# Altium PCB PCB1.PcbDoc
Units mm, origin at the board's own origin, x right, y up, seen from the top; angles counter-clockwise.
Board outline 65 x 53 mm, 2 copper layers (Top Layer, Bottom Layer); 19 components, 32 nets, 102 pads, 11 vias.
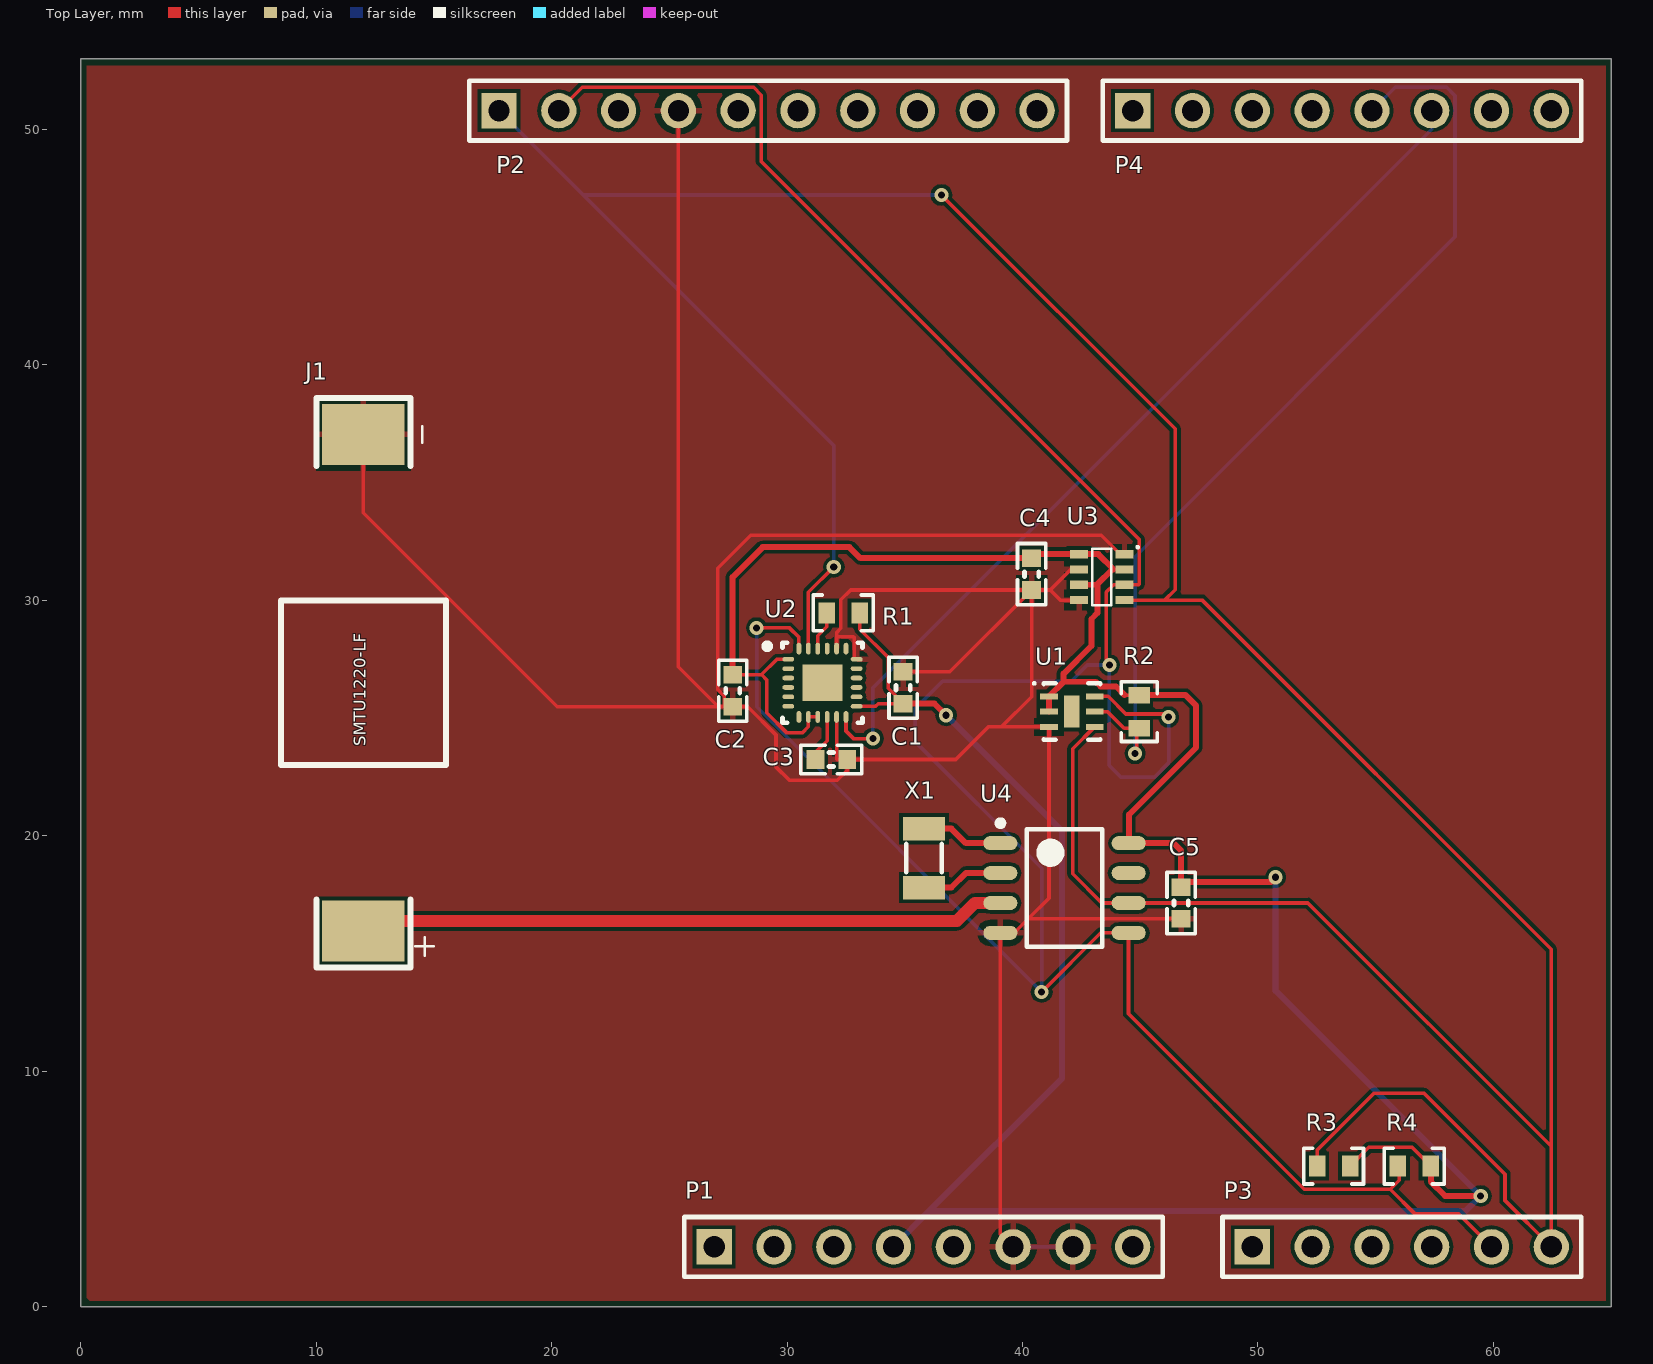
[diagram p0: Top Layer view]
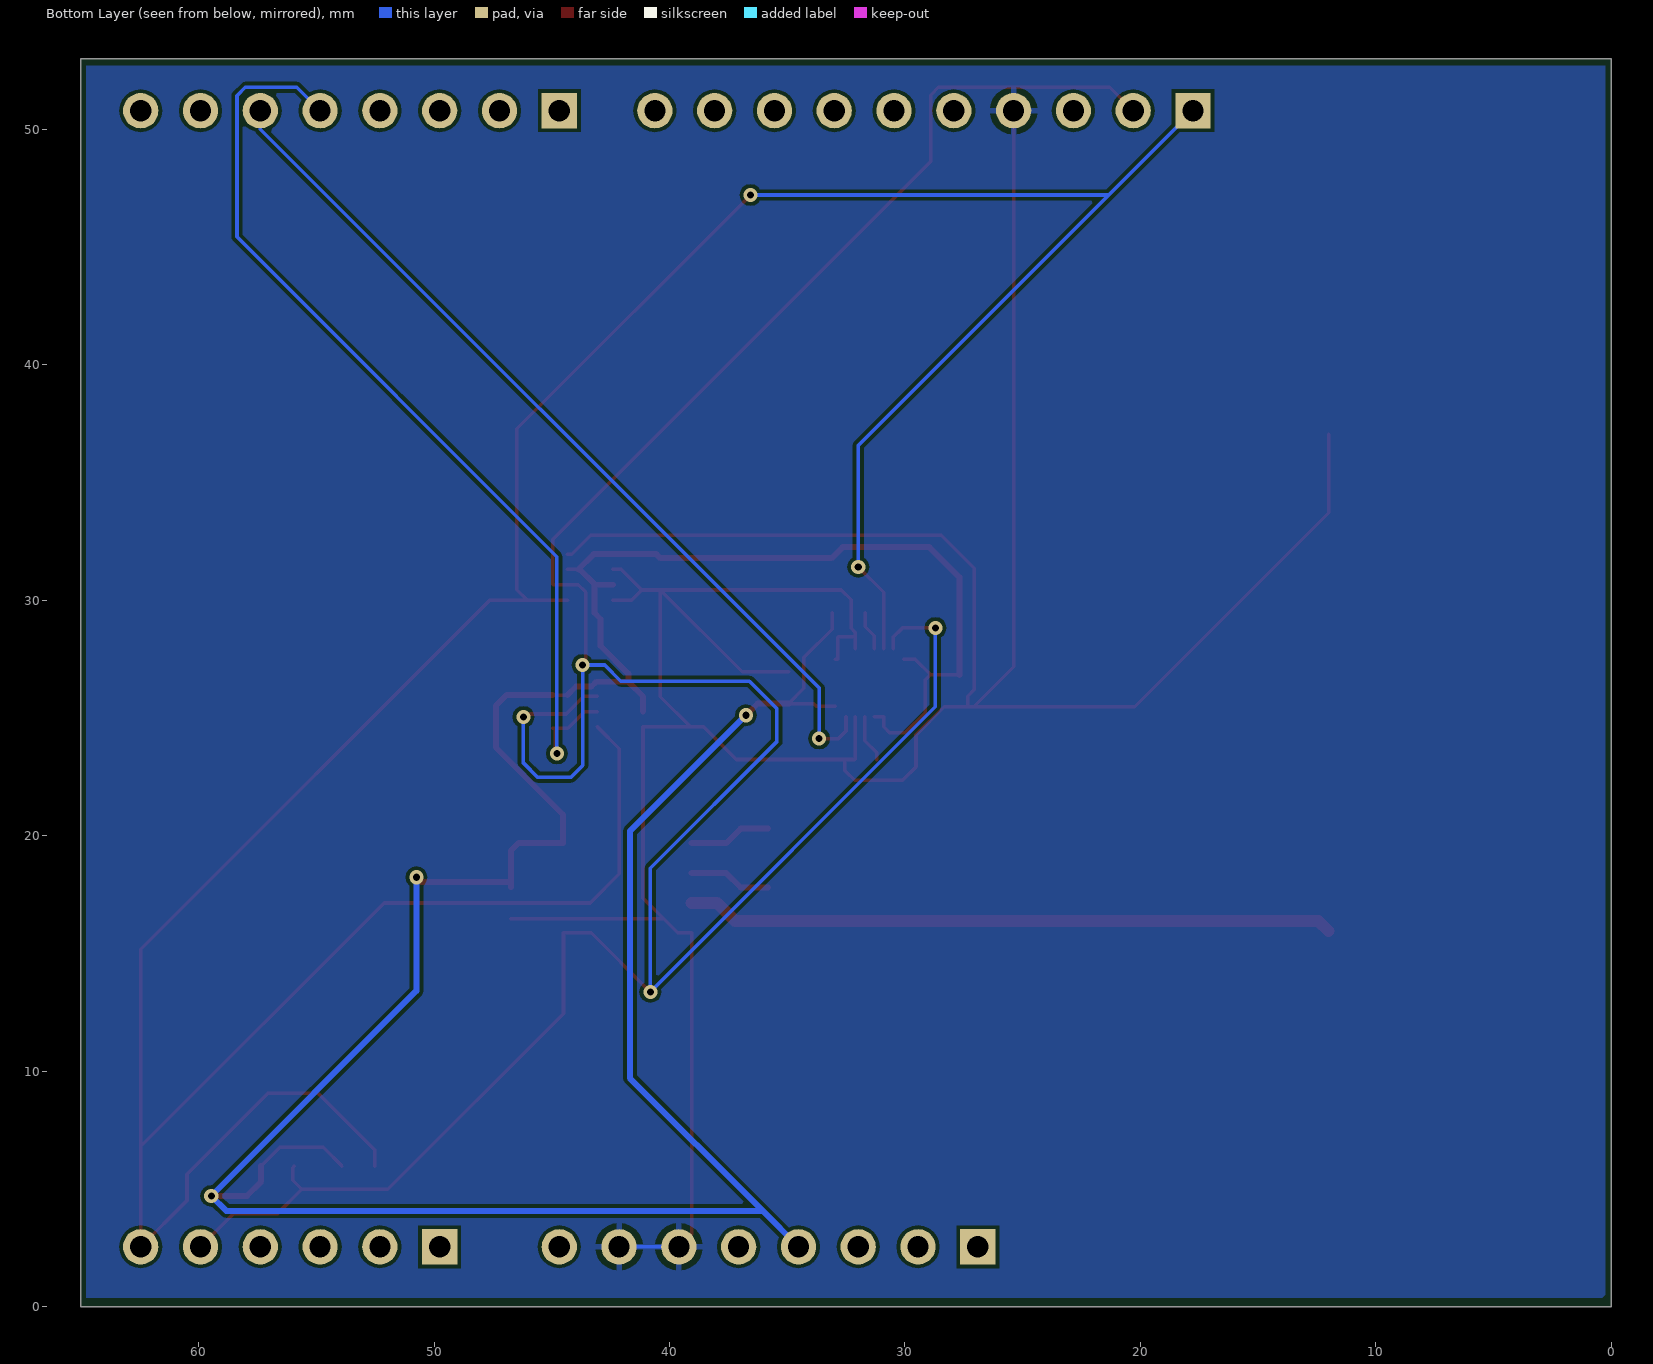
[diagram p1: Bottom Layer view, seen from below]

## Layer stack, top to bottom
Top Solder: solder mask 0.0102, Solder Resist, Dk 3.5
Top Layer: signal copper 0.0356
Dielectric 1: dielectric 0.32, FR-4, Dk 4.8
Bottom Layer: signal copper 0.0356
Bottom Solder: solder mask 0.0102, Solder Resist, Dk 3.5

## Board outline
0,0 0,53 65,53 65,0

## Design rules (kind name [scope] priority, off if disabled: settings)
Clearance [All] p1: gap=0.152
HoleToHoleClearance [All] p1: gap=0.152 allowstackedmicrovias=TRUE
LayerPairs [All] p1 off: enforce=TRUE
MinimumSolderMaskSliver [All] p1 off: minsoldermaskwidth=0.152
NetAntennae [All] p1 off: netantennaetolerance=0
PolygonConnect [All] p1: connectstyle=Relief reliefconductorwidth=0.254 reliefentries=4 polygonreliefangle="90 Angle" airgapwidth=0.254
RoutingVias [All] p1: holewidth=0.711 width=1.27 viastyle="Through Hole" minholewidth=0.711 minwidth=1.27 maxholewidth=0.711 maxwidth=1.27
SilkToBoardRegionClearance [All] p1 off:
SilkToSilkClearance [All] p1 off: silktosilkclearance=0.152
SilkToSolderMaskClearance [IsPad] p1 off: minsilkscreentomaskgap=0.152 clearancetoexposedcopper=TRUE
SolderMaskExpansion [All] p1: expansion=0.102
UnpouredPolygon [All] p1: allowunpoured=FALSE
Width [All] p1: maxlimit=20 minlimit=0.152 preferedwidth=0.254
22 further rules are at their usual default settings.

## Components (designator, comment, footprint, x,y, rotation, side; value= is the part's Value field where it differs from the comment)
C1 "0.1uF" CAPC1608X06L 34.925,26.289 r270 top
C2 "10nF" CAPC1608X06L 27.686,26.162 r90 top
C3 "0.1uF" CAPC1608X06L 31.877,23.241 r180 top
C4 "0.1uF" CAPC1608X06L 40.386,31.115 r90 top
C5 "0.1uF" CAPC1608X06L 46.736,17.145 r90 top
J1 "COIN_CELL" SMTU1220-LF 12,26.5 r90 top
P1 "Header 8" HDR1X8 26.9,2.54 r0 top locked
P2 "Header 10" HDR1X10 17.76,50.8 r0 top locked
P3 "Header 6" HDR1X6 49.76,2.54 r0 top locked
P4 "Header 8" HDR1X8 44.68,50.8 r0 top locked
R1 "4.7k" RESC1608X06N 32.385,29.464 r0 top
R2 "4.7k" RESC1608X06N 44.958,25.273 r90 top
R3 "4.7k" RESC1608X06N 53.213,5.969 r0 top
R4 "4.7k" RESC1608X06N 56.642,5.969 r0 top
U1 "OPT3001" SON65P200X65_HS-7N 42.095,25.273 r0 top
U2 "MPU9250" QFN40P300X300X105_HS-25N 31.5,26.5 r0 top locked
U3 "BMP280" SON65P200X100-8N 43.365,30.988 r0 top
U4 "PCF8523T" SOIC127P600X175-8N 41.783,17.78 r0 top
X1 "32.768KHz" XTAL_3215 35.814,19.05 r90 top

## Footprints (in the part's own frame and the unit in brackets; to place one, negate y for a bottom-side part, rotate by r counter-clockwise, add the part's x,y. Pads: shape width x height; smd on the part's side, far side on the other; paste and mask are expansions set on the pad)
CAPC1608X06L [mm]
  rect 0.75x0.8 smd: 1(-0.675,0) 2(0.675,0)
  silkscreen extent -1.3,-0.6 1.3,0.6, body extent -0.8,-0.43 0.8,0.43, height 0.8
HDR1X6 [mm] "Connector; Header; 6 Position"
  rect 1.5x1.5 hole 0.9: 1(0,0)
  round 1.5 hole 0.9: 2(2.54,0) 3(5.08,0) 4(7.62,0) 5(10.16,0) 6(12.7,0)
  silkscreen extent -1.27,-1.27 13.97,1.27
HDR1X8 [mm] "Connector; Header; 8 Position"
  rect 1.5x1.5 hole 0.9: 1(0,0)
  round 1.5 hole 0.9: 2(2.54,0) 3(5.08,0) 4(7.62,0) 5(10.16,0) 6(12.7,0) 7(15.24,0) 8(17.78,0)
  silkscreen extent -1.27,-1.27 19.05,1.27
HDR1X10 [mm] "Connector; Header; 10 Position"
  rect 1.5x1.5 hole 0.9: 1(0,0)
  round 1.5 hole 0.9: 2(2.54,0) 3(5.08,0) 4(7.62,0) 5(10.16,0) 6(12.7,0) 7(15.24,0) 8(17.78,0) 9(20.32,0) 10(22.86,0)
  silkscreen extent -1.27,-1.27 24.13,1.27
QFN40P300X300X105_HS-25N [mm] "QFN, 24-Leads, Body 3.00x3.00mm, Pitch 0.40mm, Thermal Pad 1.70x1.54mm, IPC Medium Density"
  oval 0.5x0.2 smd: 1(-1.45,1) 2(-1.45,0.6) 3(-1.45,0.2) 4(-1.45,-0.2) 5(-1.45,-0.6) 6(-1.45,-1) 13(1.45,-1) 14(1.45,-0.6) 15(1.45,-0.2) 16(1.45,0.2) 17(1.45,0.6) 18(1.45,1)
  oval 0.2x0.5 smd: 7(-1,-1.45) 8(-0.6,-1.45) 9(-0.2,-1.45) 10(0.2,-1.45) 11(0.6,-1.45) 12(1,-1.45) 19(1,1.45) 20(0.6,1.45) 21(0.2,1.45) 22(-0.2,1.45) 23(-0.6,1.45) 24(-1,1.45)
  rect 1.7x1.54 smd: 25(0,0)
  silkscreen extent -2.47,-1.7 1.7,1.7, body extent -1.55,-1.55 1.55,1.55, height 1.05
RESC1608X06N [mm] "Chip Resistor, 2-Leads, Body 1.60x0.80mm, IPC Medium Density"
  rect 0.7x0.9 smd: 1(-0.7,0) 2(0.7,0)
  silkscreen extent -1.27,-0.76 1.27,0.76, body extent -0.85,-0.45 0.85,0.45, height 0.55
SMTU1220-LF [mm]
  rect 2.6x3.5 smd: 1(-10.55,0) 2(10.55,0)
  silkscreen extent -12.1,-3.5 12.1,3.5
SOIC127P600X175-8N [mm] "SOIC, 8-Leads, Body 4.90x3.90mm, Pitch 1.27mm, IPC Medium Density"
  oval 1.45x0.6 smd: 1(-2.725,1.905) 2(-2.725,0.635) 3(-2.725,-0.635) 4(-2.725,-1.905) 5(2.725,-1.905) 6(2.725,-0.635) 7(2.725,0.635) 8(2.725,1.905)
  silkscreen extent -2.85,-2.5 1.6,2.88, body extent -2,-2.5 2,2.5, height 1.75
SON65P200X65_HS-7N [mm] "SON, 6-Leads, Body 2.00x2.00mm, Pitch 0.65mm, Thermal Pad 1.35x0.65mm, IPC Medium Density"
  rect 0.75x0.25 smd mask+0: 1(-0.97,0.65) 2(-0.97,0) 3(-0.97,-0.65) 4(0.97,-0.65) 5(0.97,0) 6(0.97,0.65)
  rect 0.65x1.35 smd: 7(0,0)
  silkscreen extent -1.65,-1.2 1.2,1.25, body extent -1.05,-1.05 1.05,1.05, height 0.65
SON65P200X100-8N [mm] "SON, 8-Leads, Body 2.50x2.00mm, Pitch 0.65mm, IPC Medium Density"
  rect 0.75x0.35 smd mask+0: 1(0.965,0.975) 2(0.965,0.325) 3(0.965,-0.325) 4(0.965,-0.975) 5(-0.965,-0.975) 6(-0.965,-0.325) 7(-0.965,0.325) 8(-0.965,0.975)
  silkscreen extent -0.4,-1.2 1.57,1.32, body extent -1.05,-1.3 1.05,1.3, height 1
XTAL_3215 [mm]
  rect 1x1.8 smd: 1(-1.25,0) 2(1.25,0)
  silkscreen extent -0.6,-0.75 0.6,0.75, body extent -1.6,-0.75 1.6,0.75, height 0.81

## Part data
P1 P4: "Header, 8-Pin"
P2: "Header, 10-Pin"
P3: "Header, 6-Pin"
X1: "32.768KHZ ±20PPM,9.0PF - CRYSTAL, SM, WATCH"

## Via types
v1: diameter 0.6, hole 0.3, Top Layer to Bottom Layer, 11 vias

## Nets (pads, with @x,y where several pads share a name; then routed paths per layer and width w, separated by ;. In a path a pad name is that pad's centre, name@x,y a point inside that pad or via, vN(x,y) a via of type N, cw(c..) or ccw(c..) an arc to the next point about the centre after c; other vN are vias at no path point)
3V3: C1.2 C2.2 C4.2 C5.2 P1.4 R1.2 R2.2 R3.2 R4.2 U1.1 U1.2 U2.1 U2.8 U2.9 U2.13 U3.2 U3.6 U3.8 U4.8 | length 142.7
  Top Layer w0.152: C2.2 28.916,26.837 29.134,26.619 29.134,25.222 29.972,24.384 30.658,24.384 30.9,24.626 U2.8 U2.9 ; 28.903,26.837 29.566,27.5 U2.1 ; U2.13 33.755,25.5 33.869,25.614 C1.2 34.925,25.629 34.29,26.264 34.29,27.573 33.085,28.778 R1.2 ; U3.8 U3.8@42.418,31.963 ; 43.815,31.313 43.871,31.313 U3.2 ; 44.334,25.973 R2.2 ; U4.8 U4.8@44.526,19.685 ; C5.2 C5.2@46.749,18.034 ; R3.2 54.712,6.768 56.543,6.768 R4.2
  Top Layer w0.254: C2.2 27.686,30.988 28.956,32.258 32.639,32.258 33.107,31.79 C4.2 40.559,31.963 U3.8 ; C1.2 36.26,25.614 v1(36.754,25.121) ; U1.2 U1.1 41.745,26.543 ; U3.6 43.165,30.663 43.18,30.678 ; U3.8@42.418,31.963 43.221,31.963 43.871,31.313 ; 43.815,31.313 43.18,30.678 ; 44.334,25.973 43.967,26.34 43.309,26.34 43.107,26.543 41.745,26.543 ; R2.2 46.925,25.973 47.371,25.527 47.371,23.749 44.526,20.904 44.526,19.685 46.419,19.685 46.736,19.367 C5.2 ; C5.2@46.749,18.034 50.546,18.034 v1(50.749,18.237) ; R4.2 57.342,5.309 57.952,4.699 v1(59.461,4.699) ; 41.745,26.543 41.745,26.886 42.926,28.067 42.926,29.21 43.18,29.464 43.18,30.678
  Bottom Layer w0.254: P1.4 36.044,4.064 ; v1(36.754,25.121) 41.681,20.193 41.681,9.701 36.044,4.064 ; v1(50.749,18.237) 50.749,13.411 v1(59.461,4.699) 58.826,4.064 36.044,4.064
5V: P1.5
AREF: P2.3
GND: C1.1 C2.1 C3.1 C4.1 C5.1 J1.2 P1.6 P1.7 P2.4 U1.3 U2.11 U2.18 U2.20 U3.1 U3.5 U3.7 U4.4 | length 153.4
  Top Layer w0.152: J1.2 12,33.72 20.233,25.487 27.076,25.487 ; P2.4 25.38,27.183 27.076,25.487 ; U2.11 32.1,23.266 32.125,23.241 C3.1 ; U2.20 32.1,28.423 ; U2.18 32.842,27.5 32.842,28.423 32.817,28.448 32.125,28.448 32.1,28.423 ; C1.1 36.91,26.964 C4.1 ; P1.6 39.058,3.082 U4.4 39.649,15.875 40.244,16.47 ; U1.3 U1.3@41.123,24.623 ; U3.5 41.6,30.013 41.173,30.44 ; U3.7 42.046,31.313 41.173,30.44 ; U3.1 44.145,31.963 43.342,32.766 28.448,32.766 27.051,31.369 27.051,26.213 27.33,25.933 C2.1@27.33,25.487 ; C5.1 40.244,16.47 ; 27.076,25.487 C2.1@27.33,25.487 ; C2.1@27.33,25.487 28.323,25.487 29.527,24.282 29.527,22.924 30.099,22.352 32.131,22.352 32.552,22.773 C3.1 ; 32.1,28.423 32.1,28.626 32.283,28.809 32.283,30.021 32.703,30.44 C4.1 ; C3.1 37.16,23.241 38.542,24.623 39.101,24.623 ; 39.101,24.623 U1.3@41.123,24.623 ; 39.101,24.623 40.386,25.908 C4.1 ; 40.244,16.47 41.123,17.348 U1.3@41.123,24.623 ; C4.1 41.173,30.44
  Bottom Layer w0.152: P1.6 P1.7
INT0: P4.6 U2.12 | length 38.4
  Top Layer w0.152: U2.12 32.5,24.447 32.818,24.129 v1(33.642,24.129)
  Bottom Layer w0.152: v1(33.642,24.129) 33.642,26.276 57.38,50.014 P4.6
INT1: P4.5 R2.1 U1.5 | length 40.9
  Top Layer w0.152: U1.5 43.612,25.273 44.312,24.573 R2.1@44.856,24.573 ; v1(44.78,23.495) 44.856,23.571 R2.1@44.856,24.573 ; R2.1 R2.1@44.856,24.573
  Bottom Layer w0.152: v1(44.78,23.495) 44.78,31.852 58.369,45.441 58.369,51.435 58.014,51.791 55.831,51.791 P4.5
IOREF: P1.2
NetC3_2: C3.2 U2.10 | length 2
  Top Layer w0.152: C3.2 31.202,23.545 31.7,24.043 U2.10
NetJ1_1: J1.1 U4.3 | length 27.6
  Top Layer w0.512: J1.1 12.433,16.383 37.211,16.383 37.973,17.145 U4.3
NetR1_1: R1.1 U2.22 | length 1.7
  Top Layer w0.152: U2.22 31.3,28.499 31.685,28.884 R1.1
NetU4_1: U4.1 X1.2 | length 3.5
  Top Layer w0.254: X1.2 36.977,20.3 37.592,19.685 U4.1
NetU4_2: U4.2 X1.1 | length 3.5
  Top Layer w0.254: X1.1 36.977,17.8 37.592,18.415 U4.2
PB0: P2.10
PB1: P2.9
PB2/SS: P2.8
PB3/MOSI: P2.7
PB4/MISO: P2.6
PB6/SCK: P2.5
PC0/A0: P3.1
PC1/A1: P3.2
PC2/A2: P3.3
PC3/A3: P3.4
PD0/RX: P4.8
PD1/TX: P4.7
PD4: P4.4
PD5: P4.3
PD6: P4.2
PD7: P4.1
RESET: P1.3
SCL: P2.1 P3.6 R3.1 U1.4 U2.23 U3.4 U4.6 | length 149.6
  Top Layer w0.152: U2.23 30.9,30.341 v1(31.979,31.42) ; v1(36.551,47.219) 46.482,37.287 46.482,30.457 46.038,30.013 ; U1.4 43.053,24.623 42.133,23.703 42.133,18.382 43.37,17.145 U4.6 52.121,17.145 62.46,6.806 ; U3.4 46.038,30.013 ; R3.1 52.513,6.655 54.926,9.068 57.052,9.068 60.493,5.627 60.493,4.507 P3.6 62.46,6.806 ; 46.038,30.013 47.625,30.013 62.46,15.178 62.46,6.806
  Bottom Layer w0.152: P2.1 21.341,47.219 ; v1(31.979,31.42) 31.979,36.581 21.341,47.219 ; v1(36.551,47.219) 21.341,47.219
SDA: P2.2 P3.5 R4.1 U1.6 U2.24 U3.3 U4.5 | length 129
  Top Layer w0.152: P2.2 21.291,51.791 28.575,51.791 28.905,51.46 28.905,48.641 44.958,32.588 44.958,30.688 44.933,30.663 U3.3 43.871,30.663 43.561,30.353 43.561,27.381 v1(43.688,27.254) ; v1(28.702,28.829) 30.099,28.829 30.5,28.428 U2.24 ; v1(40.811,13.367) 43.32,15.875 U4.5@44.501,15.875 ; U1.6 43.637,25.923 44.389,25.171 46.076,25.171 v1(46.203,25.044) ; U4.5 U4.5@44.501,15.875 ; R4.1 56.007,5.904 56.007,5.374 55.62,4.987 ; P3.5 58.523,3.937 56.67,3.937 55.62,4.987 ; U4.5@44.501,15.875 44.501,12.446 51.96,4.987 55.62,4.987
  Bottom Layer w0.152: v1(28.702,28.829) 28.702,25.476 v1(40.811,13.367) 40.811,18.625 35.433,24.003 35.433,25.4 36.601,26.568 42.062,26.568 42.748,27.254 v1(43.688,27.254) 43.688,22.987 44.196,22.479 45.593,22.479 46.203,23.089 v1(46.203,25.044)
VIN: P1.8
pads on no net: P1.1 U1.7 U2.2 U2.3 U2.4 U2.5 U2.6 U2.7 U2.14 U2.15 U2.16 U2.17 U2.19 U2.21 U2.25 U4.7

## Polygon pours and split planes (outlines as drawn)
GND on Top Layer "TOP" (solid, pour order 16): 0.254,52.705 64.77,52.705 64.77,0.254 0.381,0.254 0.254,0.381 0.254,52.705
GND on Bottom Layer "BOTTOM" (solid, pour order 18): 0.254,52.705 64.77,52.705 64.77,0.381 0.381,0.381 0.254,0.508 0.254,52.705

## Silkscreen, mask and mechanical layers (free items; w line width, h text height)
Mechanical 1:
  the board outline again, w0.1

## Text inside footprints (layer, text, board x,y; h text height)
J1: Top Overlay "SMTU1220-LF" at 12.1,23.8 h0.51 r90